# EAGLE board 13475-THAT_1646_Breakout-panel.v10 (EAGLE 7.5.0)
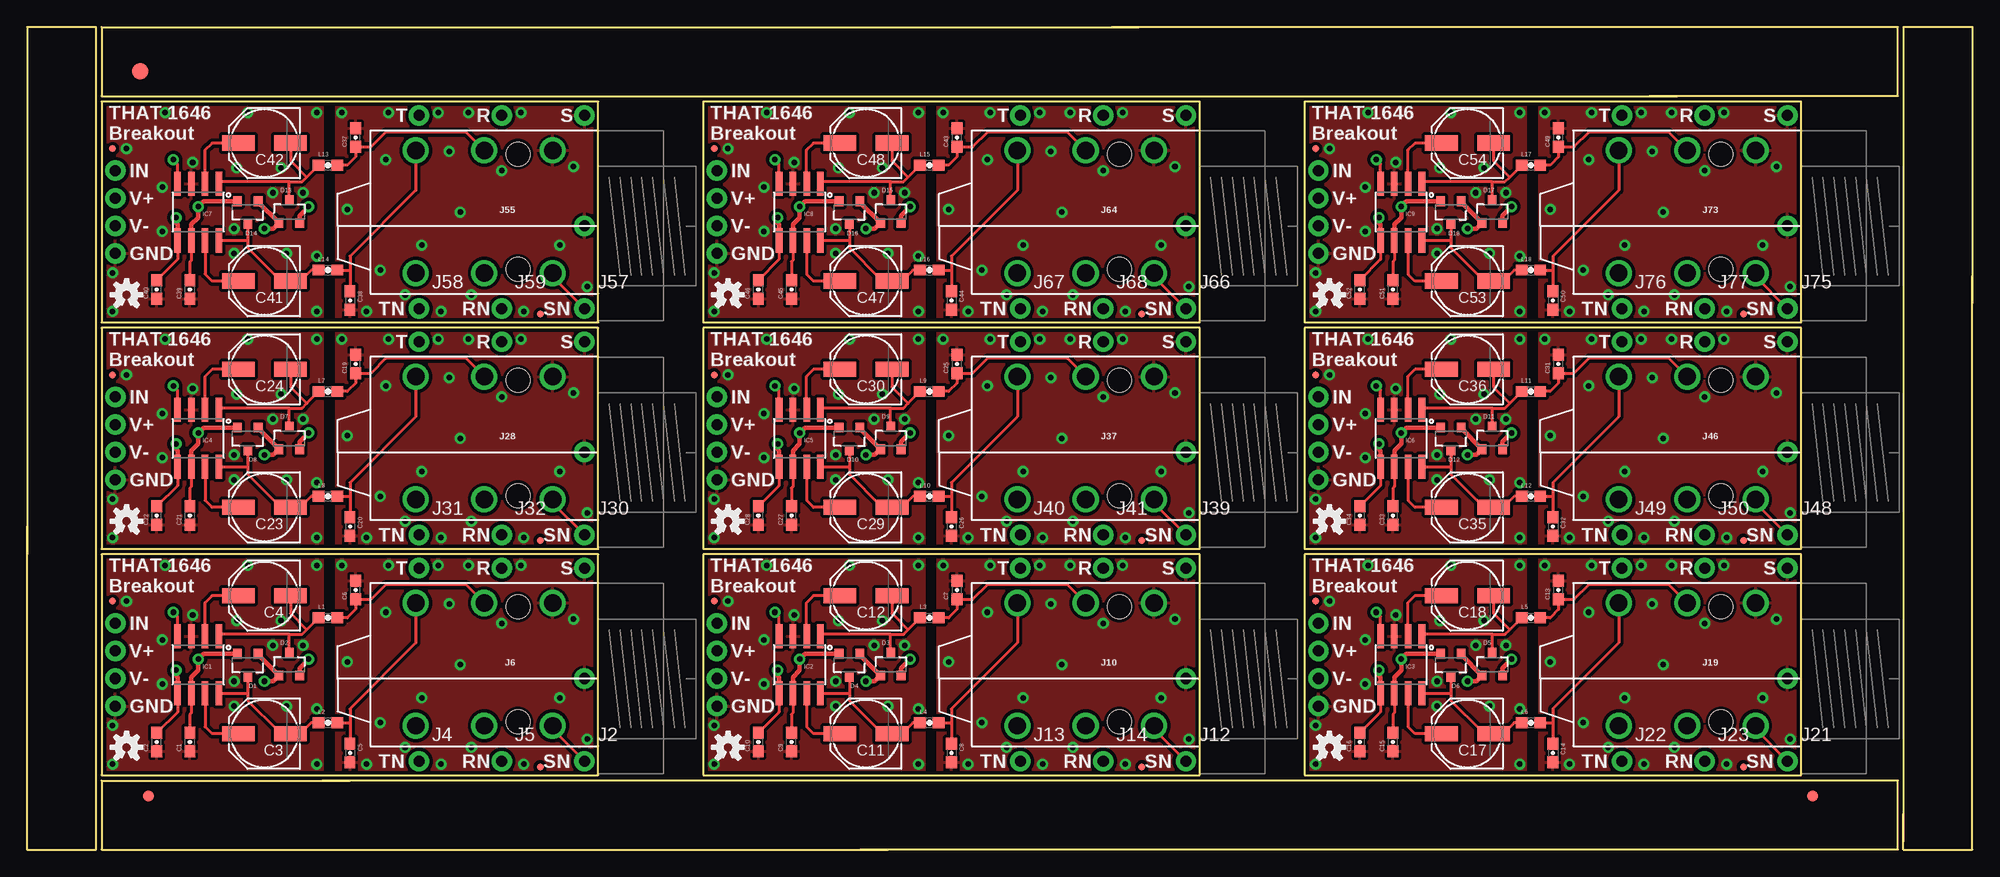
[diagram p0: board, top side]
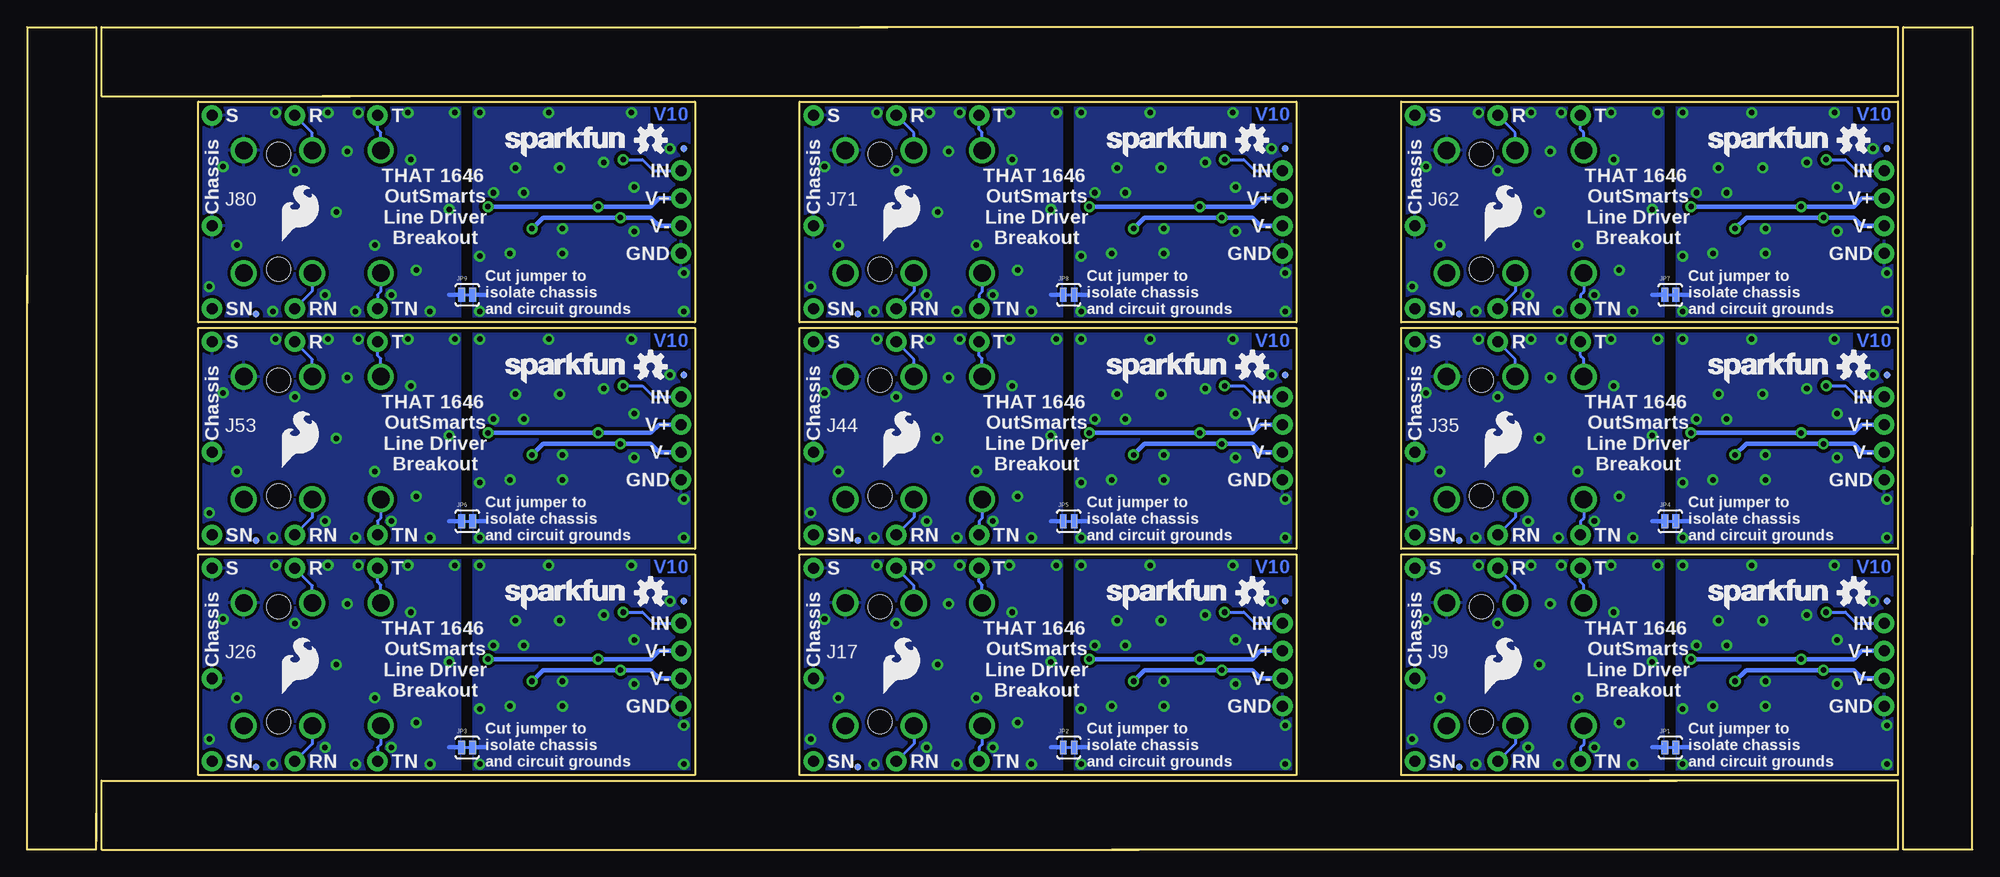
[diagram p1: board, bottom side, seen from below]

Size 179.07 x 75.69 mm. Coordinates in mm from the lower left corner, seen from the top.
Outline: 0,29.72 0,0 6.35,0 6.35,75.69 0,75.69 0,27.18
Outline: 79.25,0 6.86,0 6.86,6.35 29.72,6.35
Outline: 27.18,6.35 172.21,6.35 172.21,0 76.71,0
Outline: 172.72,0.76 172.72,75.69 179.07,75.69 179.07,50.29
Outline: 179.07,52.83 179.07,0 172.72,0 172.72,3.3
Outline: 99.82,75.69 172.21,75.69 172.21,69.34 149.35,69.34
Outline: 151.89,69.34 6.86,69.34 6.86,75.69 102.36,75.69
Outline: 6.86,6.86 52.58,6.86 52.58,27.18 6.86,27.18 6.86,6.86
Outline: 62.23,6.86 107.95,6.86 107.95,27.18 62.23,27.18 62.23,6.86
Outline: 117.6,6.86 163.32,6.86 163.32,27.18 117.6,27.18 117.6,6.86
Outline: 6.86,27.69 52.58,27.69 52.58,48.01 6.86,48.01 6.86,27.69
Outline: 62.23,27.69 107.95,27.69 107.95,48.01 62.23,48.01 62.23,27.69
Outline: 117.6,27.69 163.32,27.69 163.32,48.01 117.6,48.01 117.6,27.69
Outline: 6.86,48.51 52.58,48.51 52.58,68.83 6.86,68.83 6.86,48.51
Outline: 62.23,48.51 107.95,48.51 107.95,68.83 62.23,68.83 62.23,48.51
Outline: 117.6,48.51 163.32,48.51 163.32,68.83 117.6,68.83 117.6,48.51
Copper layers (1*16): Top 0.035mm / dielectric 1.5mm / Bottom 0.035mm
Design rules "SparkFun-2-layer-STANDARD": minimum track width 10mil, minimum drill 20mil, track to track 10mil, track to pad 8mil, pad to pad 8mil, via to via 10mil, smd to smd 8mil, copper to edge 8mil, drill to drill 8mil, minimum pad ring 10mil, minimum via ring 10mil, stop-mask expansion 4mil, vias tented up to drill 25mil, thermal gap 10mil

## Footprints (pad centres in the part's own frame; a part is rotated, then mirrored left to right if it is on the bottom)
0603-CAP = smd 1.1 x 1: 1 -0.85,0; 2 0.85,0
PANASONIC_D = smd 3 x 1.4: + 2.4,0; - -2.4,0
SOT23-3 = smd 0.8 x 0.9: 1 -0.95,-1; 2 0.95,-1; 3 0,1.1
FIDUCIAL-1.5X3 = smd 1.5 x 1.5: 1 0,0
FIDUCIAL-1X2 = smd 1 x 1: 1 0,0
MICRO-FIDUCIAL = smd 0.635 x 0.635: 1 0,0
SO08 = smd 0.61 x 2.21: 1 -1.905,-2.616; 2 -0.635,-2.616; 3 0.635,-2.616; 4 1.905,-2.616; 5 1.905,2.616; 6 0.635,2.616; 7 -0.635,2.616; 8 -1.905,2.616
1X04_NO_SILK_ALL_ROUND = drill 1.016 pad 1.88: 1 0,0; 2 2.54,0; 3 5.08,0; 4 7.62,0
1X01_NO_SILK = drill 1.016 pad 1.88: 1 0,0
AUDIO_JACK_0.25"_TRS_PTH_RA = drill 1.6: RING 10.5,-6.95; RING-NORM 10.5,4.35; SLEEVE 4.2,-6.95; SLEEVE-NORM 4.2,4.35; TIP 16.8,-6.95; TIP-NORM 16.8,4.35 | hole 2.2: 7.4,4; 7.4,-6.6
PAD-JUMPER-2-NC_BY_TRACE_YES_SILK = smd 0.635 x 1.27: 1 -0.508,0; 2 0.508,0
0603 = smd 1.1 x 1: 1 -0.85,0; 2 0.85,0

## Placement (x,y rotation side)
C1  0.1uF  [0603-CAP]  14.99,9.91 90 top
C2  0.1uF  [0603-CAP]  11.94,9.91 90 top
C3  10uf NP  [PANASONIC_D]  21.84,10.67 180 top
C4  10uf NP  [PANASONIC_D]  21.84,23.37 180 top
C5  100pF  [0603-CAP]  29.72,8.89 270 top
C6  100pF  [0603-CAP]  30.23,23.88 90 top
C7  100pF  [0603-CAP]  85.6,23.88 90 top
C8  100pF  [0603-CAP]  85.09,8.89 270 top
C9  0.1uF  [0603-CAP]  70.36,9.91 90 top
C10  0.1uF  [0603-CAP]  67.31,9.91 90 top
C11  10uf NP  [PANASONIC_D]  77.22,10.67 180 top
C12  10uf NP  [PANASONIC_D]  77.22,23.37 180 top
C13  100pF  [0603-CAP]  140.97,23.88 90 top
C14  100pF  [0603-CAP]  140.46,8.89 270 top
C15  0.1uF  [0603-CAP]  125.73,9.91 90 top
C16  0.1uF  [0603-CAP]  122.68,9.91 90 top
C17  10uf NP  [PANASONIC_D]  132.59,10.67 180 top
C18  10uf NP  [PANASONIC_D]  132.59,23.37 180 top
C19  100pF  [0603-CAP]  30.23,44.7 90 top
C20  100pF  [0603-CAP]  29.72,29.72 270 top
C21  0.1uF  [0603-CAP]  14.99,30.73 90 top
C22  0.1uF  [0603-CAP]  11.94,30.73 90 top
C23  10uf NP  [PANASONIC_D]  21.84,31.5 180 top
C24  10uf NP  [PANASONIC_D]  21.84,44.2 180 top
C25  100pF  [0603-CAP]  85.6,44.7 90 top
C26  100pF  [0603-CAP]  85.09,29.72 270 top
C27  0.1uF  [0603-CAP]  70.36,30.73 90 top
C28  0.1uF  [0603-CAP]  67.31,30.73 90 top
C29  10uf NP  [PANASONIC_D]  77.22,31.5 180 top
C30  10uf NP  [PANASONIC_D]  77.22,44.2 180 top
C31  100pF  [0603-CAP]  140.97,44.7 90 top
C32  100pF  [0603-CAP]  140.46,29.72 270 top
C33  0.1uF  [0603-CAP]  125.73,30.73 90 top
C34  0.1uF  [0603-CAP]  122.68,30.73 90 top
C35  10uf NP  [PANASONIC_D]  132.59,31.5 180 top
C36  10uf NP  [PANASONIC_D]  132.59,44.2 180 top
C37  100pF  [0603-CAP]  30.23,65.53 90 top
C38  100pF  [0603-CAP]  29.72,50.55 270 top
C39  0.1uF  [0603-CAP]  14.99,51.56 90 top
C40  0.1uF  [0603-CAP]  11.94,51.56 90 top
C41  10uf NP  [PANASONIC_D]  21.84,52.32 180 top
C42  10uf NP  [PANASONIC_D]  21.84,65.02 180 top
C43  100pF  [0603-CAP]  85.6,65.53 90 top
C44  100pF  [0603-CAP]  85.09,50.55 270 top
C45  0.1uF  [0603-CAP]  70.36,51.56 90 top
C46  0.1uF  [0603-CAP]  67.31,51.56 90 top
C47  10uf NP  [PANASONIC_D]  77.22,52.32 180 top
C48  10uf NP  [PANASONIC_D]  77.22,65.02 180 top
C49  100pF  [0603-CAP]  140.97,65.53 90 top
C50  100pF  [0603-CAP]  140.46,50.55 270 top
C51  0.1uF  [0603-CAP]  125.73,51.56 90 top
C52  0.1uF  [0603-CAP]  122.68,51.56 90 top
C53  10uf NP  [PANASONIC_D]  132.59,52.32 180 top
C54  10uf NP  [PANASONIC_D]  132.59,65.02 180 top
D1  BAV99  [SOT23-3]  20.32,17.02 180 top
D2  BAV99  [SOT23-3]  24.13,17.02 0 top
D3  BAV99  [SOT23-3]  79.5,17.02 0 top
D4  BAV99  [SOT23-3]  75.69,17.02 180 top
D5  BAV99  [SOT23-3]  134.87,17.02 0 top
D6  BAV99  [SOT23-3]  131.06,17.02 180 top
D7  BAV99  [SOT23-3]  24.13,37.85 0 top
D8  BAV99  [SOT23-3]  20.32,37.85 180 top
D9  BAV99  [SOT23-3]  79.5,37.85 0 top
D10  BAV99  [SOT23-3]  75.69,37.85 180 top
D11  BAV99  [SOT23-3]  134.87,37.85 0 top
D12  BAV99  [SOT23-3]  131.06,37.85 180 top
D13  BAV99  [SOT23-3]  24.13,58.67 0 top
D14  BAV99  [SOT23-3]  20.32,58.67 180 top
D15  BAV99  [SOT23-3]  79.5,58.67 0 top
D16  BAV99  [SOT23-3]  75.69,58.67 180 top
D17  BAV99  [SOT23-3]  134.87,58.67 0 top
D18  BAV99  [SOT23-3]  131.06,58.67 180 top
E$1  [FIDUCIAL-1.5X3]  10.41,71.63 0 top
E$3  [FIDUCIAL-1X2]  11.18,4.95 270 top
E$4  [FIDUCIAL-1X2]  164.34,4.95 90 top
FD1  FIDUCIALUFIDUCIAL  [MICRO-FIDUCIAL]  7.87,22.86 0 bottom
FD2  FIDUCIALUFIDUCIAL  [MICRO-FIDUCIAL]  47.24,7.62 0 bottom
FD3  FIDUCIALUFIDUCIAL  [MICRO-FIDUCIAL]  7.87,22.86 0 top
FD4  FIDUCIALUFIDUCIAL  [MICRO-FIDUCIAL]  47.24,7.62 0 top
FD5  FIDUCIALUFIDUCIAL  [MICRO-FIDUCIAL]  63.25,22.86 0 top
FD6  FIDUCIALUFIDUCIAL  [MICRO-FIDUCIAL]  102.62,7.62 0 top
FD7  FIDUCIALUFIDUCIAL  [MICRO-FIDUCIAL]  63.25,22.86 0 bottom
FD8  FIDUCIALUFIDUCIAL  [MICRO-FIDUCIAL]  102.62,7.62 0 bottom
FD9  FIDUCIALUFIDUCIAL  [MICRO-FIDUCIAL]  118.62,22.86 0 top
FD10  FIDUCIALUFIDUCIAL  [MICRO-FIDUCIAL]  157.99,7.62 0 top
FD11  FIDUCIALUFIDUCIAL  [MICRO-FIDUCIAL]  118.62,22.86 0 bottom
FD12  FIDUCIALUFIDUCIAL  [MICRO-FIDUCIAL]  157.99,7.62 0 bottom
FD13  FIDUCIALUFIDUCIAL  [MICRO-FIDUCIAL]  7.87,43.69 0 top
FD14  FIDUCIALUFIDUCIAL  [MICRO-FIDUCIAL]  47.24,28.45 0 top
FD15  FIDUCIALUFIDUCIAL  [MICRO-FIDUCIAL]  7.87,43.69 0 bottom
FD16  FIDUCIALUFIDUCIAL  [MICRO-FIDUCIAL]  47.24,28.45 0 bottom
FD17  FIDUCIALUFIDUCIAL  [MICRO-FIDUCIAL]  63.25,43.69 0 top
FD18  FIDUCIALUFIDUCIAL  [MICRO-FIDUCIAL]  102.62,28.45 0 top
FD19  FIDUCIALUFIDUCIAL  [MICRO-FIDUCIAL]  63.25,43.69 0 bottom
FD20  FIDUCIALUFIDUCIAL  [MICRO-FIDUCIAL]  102.62,28.45 0 bottom
FD21  FIDUCIALUFIDUCIAL  [MICRO-FIDUCIAL]  118.62,43.69 0 top
FD22  FIDUCIALUFIDUCIAL  [MICRO-FIDUCIAL]  157.99,28.45 0 top
FD23  FIDUCIALUFIDUCIAL  [MICRO-FIDUCIAL]  118.62,43.69 0 bottom
FD24  FIDUCIALUFIDUCIAL  [MICRO-FIDUCIAL]  157.99,28.45 0 bottom
FD25  FIDUCIALUFIDUCIAL  [MICRO-FIDUCIAL]  7.87,64.52 0 top
FD26  FIDUCIALUFIDUCIAL  [MICRO-FIDUCIAL]  47.24,49.28 0 top
FD27  FIDUCIALUFIDUCIAL  [MICRO-FIDUCIAL]  7.87,64.52 0 bottom
FD28  FIDUCIALUFIDUCIAL  [MICRO-FIDUCIAL]  47.24,49.28 0 bottom
FD29  FIDUCIALUFIDUCIAL  [MICRO-FIDUCIAL]  63.25,64.52 0 top
FD30  FIDUCIALUFIDUCIAL  [MICRO-FIDUCIAL]  102.62,49.28 0 top
FD31  FIDUCIALUFIDUCIAL  [MICRO-FIDUCIAL]  63.25,64.52 0 bottom
FD32  FIDUCIALUFIDUCIAL  [MICRO-FIDUCIAL]  102.62,49.28 0 bottom
FD33  FIDUCIALUFIDUCIAL  [MICRO-FIDUCIAL]  118.62,64.52 0 top
FD34  FIDUCIALUFIDUCIAL  [MICRO-FIDUCIAL]  157.99,49.28 0 top
FD35  FIDUCIALUFIDUCIAL  [MICRO-FIDUCIAL]  118.62,64.52 0 bottom
FD36  FIDUCIALUFIDUCIAL  [MICRO-FIDUCIAL]  157.99,49.28 0 bottom
IC1  THAT1646  [SO08]  15.75,17.02 180 top
IC2  THAT1646  [SO08]  71.12,17.02 180 top
IC3  THAT1646  [SO08]  126.49,17.02 180 top
IC4  THAT1646  [SO08]  15.75,37.85 180 top
IC5  THAT1646  [SO08]  71.12,37.85 180 top
IC6  THAT1646  [SO08]  126.49,37.85 180 top
IC7  THAT1646  [SO08]  15.75,58.67 180 top
IC8  THAT1646  [SO08]  71.12,58.67 180 top
IC9  THAT1646  [SO08]  126.49,58.67 180 top
J1  1x4  [1X04_NO_SILK_ALL_ROUND]  8.13,13.21 90 top
J2  SN  [1X01_NO_SILK]  51.31,8.13 0 top
J3  S  [1X01_NO_SILK]  51.31,25.91 0 bottom
J4  TN  [1X01_NO_SILK]  36.07,8.13 0 top
J5  RN  [1X01_NO_SILK]  43.69,8.13 0 top
J6  OUTPUT  [AUDIO_JACK_0.25"_TRS_PTH_RA]  52.58,15.75 180 top
J7  T  [1X01_NO_SILK]  36.07,25.91 0 top
J8  R  [1X01_NO_SILK]  43.69,25.91 0 top
J9  Chassis  [1X01_NO_SILK]  51.31,15.75 0 bottom
J10  OUTPUT  [AUDIO_JACK_0.25"_TRS_PTH_RA]  107.95,15.75 180 top
J11  1x4  [1X04_NO_SILK_ALL_ROUND]  63.5,13.21 90 top
J12  SN  [1X01_NO_SILK]  106.68,8.13 0 top
J13  TN  [1X01_NO_SILK]  91.44,8.13 0 top
J14  RN  [1X01_NO_SILK]  99.06,8.13 0 top
J15  T  [1X01_NO_SILK]  91.44,25.91 0 top
J16  R  [1X01_NO_SILK]  99.06,25.91 0 top
J17  Chassis  [1X01_NO_SILK]  106.68,15.75 0 bottom
J18  S  [1X01_NO_SILK]  106.68,25.91 0 bottom
J19  OUTPUT  [AUDIO_JACK_0.25"_TRS_PTH_RA]  163.32,15.75 180 top
J20  1x4  [1X04_NO_SILK_ALL_ROUND]  118.87,13.21 90 top
J21  SN  [1X01_NO_SILK]  162.05,8.13 0 top
J22  TN  [1X01_NO_SILK]  146.81,8.13 0 top
J23  RN  [1X01_NO_SILK]  154.43,8.13 0 top
J24  T  [1X01_NO_SILK]  146.81,25.91 0 top
J25  R  [1X01_NO_SILK]  154.43,25.91 0 top
J26  Chassis  [1X01_NO_SILK]  162.05,15.75 0 bottom
J27  S  [1X01_NO_SILK]  162.05,25.91 0 bottom
J28  OUTPUT  [AUDIO_JACK_0.25"_TRS_PTH_RA]  52.58,36.58 180 top
J29  1x4  [1X04_NO_SILK_ALL_ROUND]  8.13,34.04 90 top
J30  SN  [1X01_NO_SILK]  51.31,28.96 0 top
J31  TN  [1X01_NO_SILK]  36.07,28.96 0 top
J32  RN  [1X01_NO_SILK]  43.69,28.96 0 top
J33  T  [1X01_NO_SILK]  36.07,46.74 0 top
J34  R  [1X01_NO_SILK]  43.69,46.74 0 top
J35  Chassis  [1X01_NO_SILK]  51.31,36.58 0 bottom
J36  S  [1X01_NO_SILK]  51.31,46.74 0 bottom
J37  OUTPUT  [AUDIO_JACK_0.25"_TRS_PTH_RA]  107.95,36.58 180 top
J38  1x4  [1X04_NO_SILK_ALL_ROUND]  63.5,34.04 90 top
J39  SN  [1X01_NO_SILK]  106.68,28.96 0 top
J40  TN  [1X01_NO_SILK]  91.44,28.96 0 top
J41  RN  [1X01_NO_SILK]  99.06,28.96 0 top
J42  T  [1X01_NO_SILK]  91.44,46.74 0 top
J43  R  [1X01_NO_SILK]  99.06,46.74 0 top
J44  Chassis  [1X01_NO_SILK]  106.68,36.58 0 bottom
J45  S  [1X01_NO_SILK]  106.68,46.74 0 bottom
J46  OUTPUT  [AUDIO_JACK_0.25"_TRS_PTH_RA]  163.32,36.58 180 top
J47  1x4  [1X04_NO_SILK_ALL_ROUND]  118.87,34.04 90 top
J48  SN  [1X01_NO_SILK]  162.05,28.96 0 top
J49  TN  [1X01_NO_SILK]  146.81,28.96 0 top
J50  RN  [1X01_NO_SILK]  154.43,28.96 0 top
J51  T  [1X01_NO_SILK]  146.81,46.74 0 top
J52  R  [1X01_NO_SILK]  154.43,46.74 0 top
J53  Chassis  [1X01_NO_SILK]  162.05,36.58 0 bottom
J54  S  [1X01_NO_SILK]  162.05,46.74 0 bottom
J55  OUTPUT  [AUDIO_JACK_0.25"_TRS_PTH_RA]  52.58,57.4 180 top
J56  1x4  [1X04_NO_SILK_ALL_ROUND]  8.13,54.86 90 top
J57  SN  [1X01_NO_SILK]  51.31,49.78 0 top
J58  TN  [1X01_NO_SILK]  36.07,49.78 0 top
J59  RN  [1X01_NO_SILK]  43.69,49.78 0 top
J60  T  [1X01_NO_SILK]  36.07,67.56 0 top
J61  R  [1X01_NO_SILK]  43.69,67.56 0 top
J62  Chassis  [1X01_NO_SILK]  51.31,57.4 0 bottom
J63  S  [1X01_NO_SILK]  51.31,67.56 0 bottom
J64  OUTPUT  [AUDIO_JACK_0.25"_TRS_PTH_RA]  107.95,57.4 180 top
J65  1x4  [1X04_NO_SILK_ALL_ROUND]  63.5,54.86 90 top
J66  SN  [1X01_NO_SILK]  106.68,49.78 0 top
J67  TN  [1X01_NO_SILK]  91.44,49.78 0 top
J68  RN  [1X01_NO_SILK]  99.06,49.78 0 top
J69  T  [1X01_NO_SILK]  91.44,67.56 0 top
J70  R  [1X01_NO_SILK]  99.06,67.56 0 top
J71  Chassis  [1X01_NO_SILK]  106.68,57.4 0 bottom
J72  S  [1X01_NO_SILK]  106.68,67.56 0 bottom
J73  OUTPUT  [AUDIO_JACK_0.25"_TRS_PTH_RA]  163.32,57.4 180 top
J74  1x4  [1X04_NO_SILK_ALL_ROUND]  118.87,54.86 90 top
J75  SN  [1X01_NO_SILK]  162.05,49.78 0 top
J76  TN  [1X01_NO_SILK]  146.81,49.78 0 top
J77  RN  [1X01_NO_SILK]  154.43,49.78 0 top
J78  T  [1X01_NO_SILK]  146.81,67.56 0 top
J79  R  [1X01_NO_SILK]  154.43,67.56 0 top
J80  Chassis  [1X01_NO_SILK]  162.05,57.4 0 bottom
J81  S  [1X01_NO_SILK]  162.05,67.56 0 bottom
JP1  GND-JOIN  [PAD-JUMPER-2-NC_BY_TRACE_YES_SILK]  27.81,9.4 0 bottom
JP2  GND-JOIN  [PAD-JUMPER-2-NC_BY_TRACE_YES_SILK]  83.19,9.4 0 bottom
JP3  GND-JOIN  [PAD-JUMPER-2-NC_BY_TRACE_YES_SILK]  138.56,9.4 0 bottom
JP4  GND-JOIN  [PAD-JUMPER-2-NC_BY_TRACE_YES_SILK]  27.81,30.23 0 bottom
JP5  GND-JOIN  [PAD-JUMPER-2-NC_BY_TRACE_YES_SILK]  83.19,30.23 0 bottom
JP6  GND-JOIN  [PAD-JUMPER-2-NC_BY_TRACE_YES_SILK]  138.56,30.23 0 bottom
JP7  GND-JOIN  [PAD-JUMPER-2-NC_BY_TRACE_YES_SILK]  27.81,51.05 0 bottom
JP8  GND-JOIN  [PAD-JUMPER-2-NC_BY_TRACE_YES_SILK]  83.19,51.05 0 bottom
JP9  GND-JOIN  [PAD-JUMPER-2-NC_BY_TRACE_YES_SILK]  138.56,51.05 0 bottom
L1  27uH  [0603]  27.69,21.34 0 top
L2  27uH  [0603]  27.69,11.68 0 top
L3  27uH  [0603]  83.06,21.34 0 top
L4  27uH  [0603]  83.06,11.68 0 top
L5  27uH  [0603]  138.43,21.34 0 top
L6  27uH  [0603]  138.43,11.68 0 top
L7  27uH  [0603]  27.69,42.16 0 top
L8  27uH  [0603]  27.69,32.51 0 top
L9  27uH  [0603]  83.06,42.16 0 top
L10  27uH  [0603]  83.06,32.51 0 top
L11  27uH  [0603]  138.43,42.16 0 top
L12  27uH  [0603]  138.43,32.51 0 top
L13  27uH  [0603]  27.69,62.99 0 top
L14  27uH  [0603]  27.69,53.34 0 top
L15  27uH  [0603]  83.06,62.99 0 top
L16  27uH  [0603]  83.06,53.34 0 top
L17  27uH  [0603]  138.43,62.99 0 top
L18  27uH  [0603]  138.43,53.34 0 top
LOGO1  OSHW-LOGOS  [OSHW-LOGO-S]  9.14,9.4 0 top
LOGO2  OSHW-LOGOS  [OSHW-LOGO-S]  10.92,23.62 0 bottom
LOGO3  SFE_LOGO_NAME.1_INCH  [SFE_LOGO_NAME_.1]  80.14,21.59 0 bottom
LOGO4  SFE_LOGO_FLAME.2_INCH  [SFE_LOGO_FLAME_.2]  45.21,14.1 0 bottom
LOGO5  SFE_LOGO_NAME.1_INCH  [SFE_LOGO_NAME_.1]  24.77,21.59 0 bottom
LOGO6  OSHW-LOGOS  [OSHW-LOGO-S]  64.52,9.4 0 top
LOGO7  OSHW-LOGOS  [OSHW-LOGO-S]  66.29,23.62 0 bottom
LOGO8  SFE_LOGO_FLAME.2_INCH  [SFE_LOGO_FLAME_.2]  100.58,14.1 0 bottom
LOGO9  SFE_LOGO_NAME.1_INCH  [SFE_LOGO_NAME_.1]  135.51,21.59 0 bottom
LOGO10  OSHW-LOGOS  [OSHW-LOGO-S]  119.89,9.4 0 top
LOGO11  OSHW-LOGOS  [OSHW-LOGO-S]  121.67,23.62 0 bottom
LOGO12  SFE_LOGO_FLAME.2_INCH  [SFE_LOGO_FLAME_.2]  155.96,14.1 0 bottom
LOGO13  SFE_LOGO_NAME.1_INCH  [SFE_LOGO_NAME_.1]  24.77,42.42 0 bottom
LOGO14  OSHW-LOGOS  [OSHW-LOGO-S]  9.14,30.23 0 top
LOGO15  OSHW-LOGOS  [OSHW-LOGO-S]  10.92,44.45 0 bottom
LOGO16  SFE_LOGO_FLAME.2_INCH  [SFE_LOGO_FLAME_.2]  45.21,34.92 0 bottom
LOGO17  SFE_LOGO_NAME.1_INCH  [SFE_LOGO_NAME_.1]  80.14,42.42 0 bottom
LOGO18  OSHW-LOGOS  [OSHW-LOGO-S]  64.52,30.23 0 top
LOGO19  OSHW-LOGOS  [OSHW-LOGO-S]  66.29,44.45 0 bottom
LOGO20  SFE_LOGO_FLAME.2_INCH  [SFE_LOGO_FLAME_.2]  100.58,34.92 0 bottom
LOGO21  SFE_LOGO_NAME.1_INCH  [SFE_LOGO_NAME_.1]  135.51,42.42 0 bottom
LOGO22  OSHW-LOGOS  [OSHW-LOGO-S]  119.89,30.23 0 top
LOGO23  OSHW-LOGOS  [OSHW-LOGO-S]  121.67,44.45 0 bottom
LOGO24  SFE_LOGO_FLAME.2_INCH  [SFE_LOGO_FLAME_.2]  155.96,34.92 0 bottom
LOGO25  SFE_LOGO_NAME.1_INCH  [SFE_LOGO_NAME_.1]  24.77,63.25 0 bottom
LOGO26  OSHW-LOGOS  [OSHW-LOGO-S]  9.14,51.05 0 top
LOGO27  OSHW-LOGOS  [OSHW-LOGO-S]  10.92,65.28 0 bottom
LOGO28  SFE_LOGO_FLAME.2_INCH  [SFE_LOGO_FLAME_.2]  45.21,55.75 0 bottom
LOGO29  SFE_LOGO_NAME.1_INCH  [SFE_LOGO_NAME_.1]  80.14,63.25 0 bottom
LOGO30  OSHW-LOGOS  [OSHW-LOGO-S]  64.52,51.05 0 top
LOGO31  OSHW-LOGOS  [OSHW-LOGO-S]  66.29,65.28 0 bottom
LOGO32  SFE_LOGO_FLAME.2_INCH  [SFE_LOGO_FLAME_.2]  100.58,55.75 0 bottom
LOGO33  SFE_LOGO_NAME.1_INCH  [SFE_LOGO_NAME_.1]  135.51,63.25 0 bottom
LOGO34  OSHW-LOGOS  [OSHW-LOGO-S]  119.89,51.05 0 top
LOGO35  OSHW-LOGOS  [OSHW-LOGO-S]  121.67,65.28 0 bottom
LOGO36  SFE_LOGO_FLAME.2_INCH  [SFE_LOGO_FLAME_.2]  155.96,55.75 0 bottom

## Library data of the parts
C1 C2 C9 C10 C15 C16 C21 C22 C27 C28 C33 C34 C39 C40 C45 C46 C51 C52 = SparkFun-Capacitors; PROD_ID: CAP-08604
C3 C4 C11 C12 C17 C18 C23 C24 C29 C30 C35 C36 C41 C42 C47 C48 C53 C54 = that-ics; DK_PN: PCE4294TR-ND; MFR: Panasonic; MFR_PN: 1ea100np; PROD_ID: CAP-13474
C5-C8 C13 C14 C19 C20 C25 C26 C31 C32 C37 C38 C43 C44 C49 C50 = SparkFun-Capacitors; PROD_ID: CAP-07883
D1-D18 = SparkFun-DiscreteSemi; PROD_ID: DIO-10647
E$1 = SparkFun-Retired
E$3 E$4 FD1-FD36 LOGO1-LOGO36 = SparkFun-Aesthetics
IC1-IC9 = that-ics; PROD_ID: IC-13473
J1 J11 J20 J29 J38 J47 J56 J65 J74 = SparkFun-Connectors; PROD_ID: CONN-09696
J2-J5 J7-J9 J12-J18 J21-J27 J30-J36 J39-J45 J48-J54 J57-J63 J66-J72 J75-J81 = SparkFun-Connectors
J6 J10 J19 J28 J37 J46 J55 J64 J73 = SparkFun-Connectors; PROD_ID: CONN-12339; SF_ID: COM-11144
JP1-JP9 = SparkFun-Passives
L1-L18 = SparkFun-Passives; PROD_ID: NDUC-12579

## Nets
GND: C1.1 C2.1 IC1.3 J1.1 JP1.2
GND1: C9.1 C10.1 IC2.3 J11.1 JP2.2
GND2: C15.1 C16.1 IC3.3 J20.1 JP3.2
GND3: C21.1 C22.1 IC4.3 J29.1 JP4.2
GND4: C27.1 C28.1 IC5.3 J38.1 JP5.2
GND5: C33.1 C34.1 IC6.3 J47.1 JP6.2
GND6: C39.1 C40.1 IC7.3 J56.1 JP7.2
GND7: C45.1 C46.1 IC8.3 J65.1 JP8.2
GND8: C51.1 C52.1 IC9.3 J74.1 JP9.2
GND-ISO: C5.2 C6.2 J3.1 J6.SLEEVE J9.1 JP1.1
GND-ISO1: C7.2 C8.2 J10.SLEEVE J17.1 J18.1 JP2.1
GND-ISO2: C13.2 C14.2 J19.SLEEVE J26.1 J27.1 JP3.1
GND-ISO3: C19.2 C20.2 J28.SLEEVE J35.1 J36.1 JP4.1
GND-ISO4: C25.2 C26.2 J37.SLEEVE J44.1 J45.1 JP5.1
GND-ISO5: C31.2 C32.2 J46.SLEEVE J53.1 J54.1 JP6.1
GND-ISO6: C37.2 C38.2 J55.SLEEVE J62.1 J63.1 JP7.1
GND-ISO7: C43.2 C44.2 J64.SLEEVE J71.1 J72.1 JP8.1
GND-ISO8: C49.2 C50.2 J73.SLEEVE J80.1 J81.1 JP9.1
N$1: J5.1 J6.RING-NORM
N$2: J4.1 J6.TIP-NORM
N$3: J2.1 J6.SLEEVE-NORM
N$4: C8.1 J10.TIP J15.1 L4.2
N$5: C7.1 J10.RING J16.1 L3.2
N$6: C11.- D4.3 IC2.8 L4.1
N$7: C12.- D3.3 IC2.1 L3.1
N$8: C5.1 J6.TIP J7.1 L2.2
N$9: C6.1 J6.RING J8.1 L1.2
N$10: C3.- D1.3 IC1.8 L2.1
N$11: C4.- D2.3 IC1.1 L1.1
N$12: C12.+ IC2.2
N$13: C4.+ IC1.2
N$14: C3.+ IC1.7
N$15: C11.+ IC2.7
N$16: IC1.4 J1.4
N$17: IC2.4 J11.4
N$18: J10.RING-NORM J14.1
N$19: J10.TIP-NORM J13.1
N$20: J10.SLEEVE-NORM J12.1
N$21: C14.1 J19.TIP J24.1 L6.2
N$22: C13.1 J19.RING J25.1 L5.2
N$23: C17.- D6.3 IC3.8 L6.1
N$24: C18.- D5.3 IC3.1 L5.1
N$25: C18.+ IC3.2
N$26: C17.+ IC3.7
N$27: IC3.4 J20.4
N$28: J19.RING-NORM J23.1
N$29: J19.TIP-NORM J22.1
N$30: J19.SLEEVE-NORM J21.1
N$31: C20.1 J28.TIP J33.1 L8.2
N$32: C19.1 J28.RING J34.1 L7.2
N$33: C23.- D8.3 IC4.8 L8.1
N$34: C24.- D7.3 IC4.1 L7.1
N$35: C24.+ IC4.2
N$36: C23.+ IC4.7
N$37: IC4.4 J29.4
N$38: J28.RING-NORM J32.1
N$39: J28.TIP-NORM J31.1
N$40: J28.SLEEVE-NORM J30.1
N$41: C26.1 J37.TIP J42.1 L10.2
N$42: C25.1 J37.RING J43.1 L9.2
N$43: C29.- D10.3 IC5.8 L10.1
N$44: C30.- D9.3 IC5.1 L9.1
N$45: C30.+ IC5.2
N$46: C29.+ IC5.7
N$47: IC5.4 J38.4
N$48: J37.RING-NORM J41.1
N$49: J37.TIP-NORM J40.1
N$50: J37.SLEEVE-NORM J39.1
N$51: C32.1 J46.TIP J51.1 L12.2
N$52: C31.1 J46.RING J52.1 L11.2
N$53: C35.- D12.3 IC6.8 L12.1
N$54: C36.- D11.3 IC6.1 L11.1
N$55: C36.+ IC6.2
N$56: C35.+ IC6.7
N$57: IC6.4 J47.4
N$58: J46.RING-NORM J50.1
N$59: J46.TIP-NORM J49.1
N$60: J46.SLEEVE-NORM J48.1
N$61: C38.1 J55.TIP J60.1 L14.2
N$62: C37.1 J55.RING J61.1 L13.2
N$63: C41.- D14.3 IC7.8 L14.1
N$64: C42.- D13.3 IC7.1 L13.1
N$65: C42.+ IC7.2
N$66: C41.+ IC7.7
N$67: IC7.4 J56.4
N$68: J55.RING-NORM J59.1
N$69: J55.TIP-NORM J58.1
N$70: J55.SLEEVE-NORM J57.1
N$71: C44.1 J64.TIP J69.1 L16.2
N$72: C43.1 J64.RING J70.1 L15.2
N$73: C47.- D16.3 IC8.8 L16.1
N$74: C48.- D15.3 IC8.1 L15.1
N$75: C48.+ IC8.2
N$76: C47.+ IC8.7
N$77: IC8.4 J65.4
N$78: J64.RING-NORM J68.1
N$79: J64.TIP-NORM J67.1
N$80: J64.SLEEVE-NORM J66.1
N$81: C50.1 J73.TIP J78.1 L18.2
N$82: C49.1 J73.RING J79.1 L17.2
N$83: C53.- D18.3 IC9.8 L18.1
N$84: C54.- D17.3 IC9.1 L17.1
N$85: C54.+ IC9.2
N$86: C53.+ IC9.7
N$87: IC9.4 J74.4
N$88: J73.RING-NORM J77.1
N$89: J73.TIP-NORM J76.1
N$90: J73.SLEEVE-NORM J75.1
VCC: C1.2 D1.2 D2.2 IC1.6 J1.3
VCC1: C9.2 D3.2 D4.2 IC2.6 J11.3
VCC2: C15.2 D5.2 D6.2 IC3.6 J20.3
VCC3: C21.2 D7.2 D8.2 IC4.6 J29.3
VCC4: C27.2 D9.2 D10.2 IC5.6 J38.3
VCC5: C33.2 D11.2 D12.2 IC6.6 J47.3
VCC6: C39.2 D13.2 D14.2 IC7.6 J56.3
VCC7: C45.2 D15.2 D16.2 IC8.6 J65.3
VCC8: C51.2 D17.2 D18.2 IC9.6 J74.3
VNEG: C2.2 D1.1 D2.1 IC1.5 J1.2
VNEG1: C10.2 D3.1 D4.1 IC2.5 J11.2
VNEG2: C16.2 D5.1 D6.1 IC3.5 J20.2
VNEG3: C22.2 D7.1 D8.1 IC4.5 J29.2
VNEG4: C28.2 D9.1 D10.1 IC5.5 J38.2
VNEG5: C34.2 D11.1 D12.1 IC6.5 J47.2
VNEG6: C40.2 D13.1 D14.1 IC7.5 J56.2
VNEG7: C46.2 D15.1 D16.1 IC8.5 J65.2
VNEG8: C52.2 D17.1 D18.1 IC9.5 J74.2

## Tracks (layer width: path | path; a pad name or v marks a point on that pad's centre or on a via)
GND  (via drill 0.51)
  Bottom 0.406: JP1.2 26.16,9.4
  other vias: 7.87,7.87 12.45,15.24 12.45,19.3 7.87,11.43 9.14,22.86 12.7,26.16 26.67,26.16 25.4,18.8 22.61,18.8 19.05,15.49 19.05,13.21 23.88,13.21 26.67,12.95 26.67,7.87 15.24,21.59 19.3,21.08 23.37,21.08 20.32,26.16
  pour Top (isolate 0.305): 27.18,27.18 27.18,6.86 6.86,6.86 6.86,27.18
  pour Bottom (isolate 0.305): 6.86,27.18 6.86,6.86 27.18,6.86 27.18,27.18
GND1  (via drill 0.51)
  Bottom 0.406: JP2.2 81.53,9.4
  other vias: 63.25,7.87 67.82,15.24 67.82,19.3 63.25,11.43 64.52,22.86 68.07,26.16 82.04,26.16 80.77,18.8 77.98,18.8 74.42,15.49 74.42,13.21 79.25,13.21 82.04,12.95 82.04,7.87 70.61,21.59 74.68,21.08 78.74,21.08 75.69,26.16
  pour Top (isolate 0.305): 82.55,27.18 82.55,6.86 62.23,6.86 62.23,27.18
  pour Bottom (isolate 0.305): 62.23,27.18 62.23,6.86 82.55,6.86 82.55,27.18
GND2  (via drill 0.51)
  Bottom 0.406: JP3.2 136.91,9.4
  other vias: 118.62,7.87 123.19,15.24 123.19,19.3 118.62,11.43 119.89,22.86 123.44,26.16 137.41,26.16 136.14,18.8 133.35,18.8 129.79,15.49 129.79,13.21 134.62,13.21 137.41,12.95 137.41,7.87 125.98,21.59 130.05,21.08 134.11,21.08 131.06,26.16
  pour Top (isolate 0.305): 137.92,27.18 137.92,6.86 117.6,6.86 117.6,27.18
  pour Bottom (isolate 0.305): 117.6,27.18 117.6,6.86 137.92,6.86 137.92,27.18
GND3  (via drill 0.51)
  Bottom 0.406: JP4.2 26.16,30.23
  other vias: 7.87,28.7 12.45,36.07 12.45,40.13 7.87,32.26 9.14,43.69 12.7,46.99 26.67,46.99 25.4,39.62 22.61,39.62 19.05,36.32 19.05,34.04 23.88,34.04 26.67,33.78 26.67,28.7 15.24,42.42 19.3,41.91 23.37,41.91 20.32,46.99
  pour Top (isolate 0.305): 27.18,48.01 27.18,27.69 6.86,27.69 6.86,48.01
  pour Bottom (isolate 0.305): 6.86,48.01 6.86,27.69 27.18,27.69 27.18,48.01
GND4  (via drill 0.51)
  Bottom 0.406: JP5.2 81.53,30.23
  other vias: 63.25,28.7 67.82,36.07 67.82,40.13 63.25,32.26 64.52,43.69 68.07,46.99 82.04,46.99 80.77,39.62 77.98,39.62 74.42,36.32 74.42,34.04 79.25,34.04 82.04,33.78 82.04,28.7 70.61,42.42 74.68,41.91 78.74,41.91 75.69,46.99
  pour Top (isolate 0.305): 82.55,48.01 82.55,27.69 62.23,27.69 62.23,48.01
  pour Bottom (isolate 0.305): 62.23,48.01 62.23,27.69 82.55,27.69 82.55,48.01
GND5  (via drill 0.51)
  Bottom 0.406: JP6.2 136.91,30.23
  other vias: 118.62,28.7 123.19,36.07 123.19,40.13 118.62,32.26 119.89,43.69 123.44,46.99 137.41,46.99 136.14,39.62 133.35,39.62 129.79,36.32 129.79,34.04 134.62,34.04 137.41,33.78 137.41,28.7 125.98,42.42 130.05,41.91 134.11,41.91 131.06,46.99
  pour Top (isolate 0.305): 137.92,48.01 137.92,27.69 117.6,27.69 117.6,48.01
  pour Bottom (isolate 0.305): 117.6,48.01 117.6,27.69 137.92,27.69 137.92,48.01
GND6  (via drill 0.51)
  Bottom 0.406: JP7.2 26.16,51.05
  other vias: 7.87,49.53 12.45,56.9 12.45,60.96 7.87,53.09 9.14,64.52 12.7,67.82 26.67,67.82 25.4,60.45 22.61,60.45 19.05,57.15 19.05,54.86 23.88,54.86 26.67,54.61 26.67,49.53 15.24,63.25 19.3,62.74 23.37,62.74 20.32,67.82
  pour Top (isolate 0.305): 27.18,68.83 27.18,48.51 6.86,48.51 6.86,68.83
  pour Bottom (isolate 0.305): 6.86,68.83 6.86,48.51 27.18,48.51 27.18,68.83
GND7  (via drill 0.51)
  Bottom 0.406: JP8.2 81.53,51.05
  other vias: 63.25,49.53 67.82,56.9 67.82,60.96 63.25,53.09 64.52,64.52 68.07,67.82 82.04,67.82 80.77,60.45 77.98,60.45 74.42,57.15 74.42,54.86 79.25,54.86 82.04,54.61 82.04,49.53 70.61,63.25 74.68,62.74 78.74,62.74 75.69,67.82
  pour Top (isolate 0.305): 82.55,68.83 82.55,48.51 62.23,48.51 62.23,68.83
  pour Bottom (isolate 0.305): 62.23,68.83 62.23,48.51 82.55,48.51 82.55,68.83
GND8  (via drill 0.51)
  Bottom 0.406: JP9.2 136.91,51.05
  other vias: 118.62,49.53 123.19,56.9 123.19,60.96 118.62,53.09 119.89,64.52 123.44,67.82 137.41,67.82 136.14,60.45 133.35,60.45 129.79,57.15 129.79,54.86 134.62,54.86 137.41,54.61 137.41,49.53 125.98,63.25 130.05,62.74 134.11,62.74 131.06,67.82
  pour Top (isolate 0.305): 137.92,68.83 137.92,48.51 117.6,48.51 117.6,68.83
  pour Bottom (isolate 0.305): 117.6,68.83 117.6,48.51 137.92,48.51 137.92,68.83
GND-ISO  (via drill 0.51)
  Bottom 0.406: JP1.1 29.46,9.4
  other vias: 28.96,26.16 33.27,26.16 43.69,20.83 49.02,13.97 39.88,17.02 36.32,13.97 38.1,7.87 34.8,9.4 40.89,9.4 51.56,10.16 29.46,17.27 33.02,21.84 32.51,11.68 45.72,7.87 38.86,22.61 37.85,26.16 40.64,26.16 45.47,26.16 31.24,7.87 50.29,21.21
  pour Bottom (isolate 0.305): 28.45,6.86 28.45,27.18 52.58,27.18 52.58,6.86
  pour Top (isolate 0.305): 52.58,6.86 52.58,27.18 28.45,27.18 28.45,6.86
GND-ISO1  (via drill 0.51)
  Bottom 0.406: JP2.1 84.84,9.4
  other vias: 84.33,26.16 88.65,26.16 99.06,20.83 104.39,13.97 95.25,17.02 91.69,13.97 93.47,7.87 90.17,9.4 96.27,9.4 106.93,10.16 84.84,17.27 88.39,21.84 87.88,11.68 101.09,7.87 94.23,22.61 93.22,26.16 96.01,26.16 100.84,26.16 86.61,7.87 105.66,21.21
  pour Bottom (isolate 0.305): 83.82,6.86 83.82,27.18 107.95,27.18 107.95,6.86
  pour Top (isolate 0.305): 107.95,6.86 107.95,27.18 83.82,27.18 83.82,6.86
GND-ISO2  (via drill 0.51)
  Bottom 0.406: JP3.1 140.21,9.4
  other vias: 139.7,26.16 144.02,26.16 154.43,20.83 159.77,13.97 150.62,17.02 147.07,13.97 148.84,7.87 145.54,9.4 151.64,9.4 162.31,10.16 140.21,17.27 143.76,21.84 143.26,11.68 156.46,7.87 149.61,22.61 148.59,26.16 151.38,26.16 156.21,26.16 141.99,7.87 161.04,21.21
  pour Bottom (isolate 0.305): 139.19,6.86 139.19,27.18 163.32,27.18 163.32,6.86
  pour Top (isolate 0.305): 163.32,6.86 163.32,27.18 139.19,27.18 139.19,6.86
GND-ISO3  (via drill 0.51)
  Bottom 0.406: JP4.1 29.46,30.23
  other vias: 28.96,46.99 33.27,46.99 43.69,41.66 49.02,34.8 39.88,37.85 36.32,34.8 38.1,28.7 34.8,30.23 40.89,30.23 51.56,30.99 29.46,38.1 33.02,42.67 32.51,32.51 45.72,28.7 38.86,43.43 37.85,46.99 40.64,46.99 45.47,46.99 31.24,28.7 50.29,42.04
  pour Bottom (isolate 0.305): 28.45,27.69 28.45,48.01 52.58,48.01 52.58,27.69
  pour Top (isolate 0.305): 52.58,27.69 52.58,48.01 28.45,48.01 28.45,27.69
GND-ISO4  (via drill 0.51)
  Bottom 0.406: JP5.1 84.84,30.23
  other vias: 84.33,46.99 88.65,46.99 99.06,41.66 104.39,34.8 95.25,37.85 91.69,34.8 93.47,28.7 90.17,30.23 96.27,30.23 106.93,30.99 84.84,38.1 88.39,42.67 87.88,32.51 101.09,28.7 94.23,43.43 93.22,46.99 96.01,46.99 100.84,46.99 86.61,28.7 105.66,42.04
  pour Bottom (isolate 0.305): 83.82,27.69 83.82,48.01 107.95,48.01 107.95,27.69
  pour Top (isolate 0.305): 107.95,27.69 107.95,48.01 83.82,48.01 83.82,27.69
GND-ISO5  (via drill 0.51)
  Bottom 0.406: JP6.1 140.21,30.23
  other vias: 139.7,46.99 144.02,46.99 154.43,41.66 159.77,34.8 150.62,37.85 147.07,34.8 148.84,28.7 145.54,30.23 151.64,30.23 162.31,30.99 140.21,38.1 143.76,42.67 143.26,32.51 156.46,28.7 149.61,43.43 148.59,46.99 151.38,46.99 156.21,46.99 141.99,28.7 161.04,42.04
  pour Bottom (isolate 0.305): 139.19,27.69 139.19,48.01 163.32,48.01 163.32,27.69
  pour Top (isolate 0.305): 163.32,27.69 163.32,48.01 139.19,48.01 139.19,27.69
GND-ISO6  (via drill 0.51)
  Bottom 0.406: JP7.1 29.46,51.05
  other vias: 28.96,67.82 33.27,67.82 43.69,62.48 49.02,55.63 39.88,58.67 36.32,55.63 38.1,49.53 34.8,51.05 40.89,51.05 51.56,51.82 29.46,58.93 33.02,63.5 32.51,53.34 45.72,49.53 38.86,64.26 37.85,67.82 40.64,67.82 45.47,67.82 31.24,49.53 50.29,62.87
  pour Bottom (isolate 0.305): 28.45,48.51 28.45,68.83 52.58,68.83 52.58,48.51
  pour Top (isolate 0.305): 52.58,48.51 52.58,68.83 28.45,68.83 28.45,48.51
GND-ISO7  (via drill 0.51)
  Bottom 0.406: JP8.1 84.84,51.05
  other vias: 84.33,67.82 88.65,67.82 99.06,62.48 104.39,55.63 95.25,58.67 91.69,55.63 93.47,49.53 90.17,51.05 96.27,51.05 106.93,51.82 84.84,58.93 88.39,63.5 87.88,53.34 101.09,49.53 94.23,64.26 93.22,67.82 96.01,67.82 100.84,67.82 86.61,49.53 105.66,62.87
  pour Bottom (isolate 0.305): 83.82,48.51 83.82,68.83 107.95,68.83 107.95,48.51
  pour Top (isolate 0.305): 107.95,48.51 107.95,68.83 83.82,68.83 83.82,48.51
GND-ISO8  (via drill 0.51)
  Bottom 0.406: JP9.1 140.21,51.05
  other vias: 139.7,67.82 144.02,67.82 154.43,62.48 159.77,55.63 150.62,58.67 147.07,55.63 148.84,49.53 145.54,51.05 151.64,51.05 162.31,51.82 140.21,58.93 143.76,63.5 143.26,53.34 156.46,49.53 149.61,64.26 148.59,67.82 151.38,67.82 156.21,67.82 141.99,49.53 161.04,62.87
  pour Bottom (isolate 0.305): 139.19,48.51 139.19,68.83 163.32,68.83 163.32,48.51
  pour Top (isolate 0.305): 163.32,48.51 163.32,68.83 139.19,68.83 139.19,48.51
N$1
  Bottom 0.254: J6.RING-NORM 42.08,9.74 J5.1
N$2
  Bottom 0.254: J6.TIP-NORM 35.78,9.69 36.07,9.4 J4.1
N$3
  Top 0.254: J2.1 48.38,11.06 J6.SLEEVE-NORM
N$4
  Top 0.254: 85.09,11.68 85.09,12.95 91.15,19.01 J10.TIP | 85.09,11.68 C8.1 | L4.2 85.09,11.68
  Bottom 0.254: J10.TIP 91.15,24.35 91.44,24.64 J15.1
N$5
  Top 0.254: L3.2 84.84,21.34 85.6,22.1 C7.1 87.03,23.03 88.39,24.38 95.76,24.38 J10.RING
  Bottom 0.254: J10.RING 97.45,24.3 J16.1
N$6
  Top 0.254: IC2.8 75.69,14.4 | D4.3 75.69,14.4 | L4.1 81.53,11.68 81.03,11.18 80.12,11.18 C11.- 79.36,10.92 78.49,10.92 75.69,13.72 75.69,14.4
N$7
  Top 0.254: 79.5,19.81 73.2,19.81 IC2.1 | D3.3 79.5,19.81 | 81.11,20.24 80.68,19.81 79.5,19.81 | 81.11,20.24 L3.1 | C12.- 79.62,21.73 81.11,20.24
N$8
  Top 0.254: 29.72,11.68 29.72,12.95 35.78,19.01 J6.TIP | 29.72,11.68 C5.1 | L2.2 29.72,11.68
  Bottom 0.254: J6.TIP 35.78,24.35 36.07,24.64 J7.1
N$9
  Top 0.254: L1.2 29.46,21.34 30.23,22.1 C6.1 31.66,23.03 33.02,24.38 40.39,24.38 J6.RING
  Bottom 0.254: J6.RING 42.08,24.3 J8.1
N$10
  Top 0.254: IC1.8 20.32,14.4 | D1.3 20.32,14.4 | L2.1 26.16,11.68 25.65,11.18 24.75,11.18 C3.- 23.99,10.92 23.11,10.92 20.32,13.72 20.32,14.4
N$11
  Top 0.254: 24.13,19.81 17.83,19.81 IC1.1 | D2.3 24.13,19.81 | 25.74,20.24 25.31,19.81 24.13,19.81 | 25.74,20.24 L1.1 | C4.- 24.24,21.73 25.74,20.24
N$12
  Top 0.254: IC2.2 71.75,22.73 72.39,23.37 C12.+
N$13
  Top 0.254: IC1.2 16.38,22.73 17.02,23.37 C4.+
N$14
  Top 0.254: IC1.7 16.38,11.3 17.02,10.67 C3.+
N$15
  Top 0.254: IC2.7 71.75,11.3 72.39,10.67 C11.+
N$16  (via drill 0.51)
  Top 0.254: IC1.4 13.84,21.46 v13.46,21.84
  Bottom 0.254: v13.46,21.84 11.68,21.84 10.67,20.83 J1.4
N$17  (via drill 0.51)
  Top 0.254: IC2.4 69.22,21.46 v68.83,21.84
  Bottom 0.254: v68.83,21.84 67.06,21.84 66.04,20.83 J11.4
N$18
  Bottom 0.254: J10.RING-NORM 97.45,9.74 J14.1
N$19
  Bottom 0.254: J10.TIP-NORM 91.15,9.69 91.44,9.4 J13.1
N$20
  Top 0.254: J12.1 103.75,11.06 J10.SLEEVE-NORM
N$21
  Top 0.254: 140.46,11.68 140.46,12.95 146.52,19.01 J19.TIP | 140.46,11.68 C14.1 | L6.2 140.46,11.68
  Bottom 0.254: J19.TIP 146.52,24.35 146.81,24.64 J24.1
N$22
  Top 0.254: L5.2 140.21,21.34 140.97,22.1 C13.1 142.41,23.03 143.76,24.38 151.14,24.38 J19.RING
  Bottom 0.254: J19.RING 152.82,24.3 J25.1
N$23
  Top 0.254: IC3.8 131.06,14.4 | D6.3 131.06,14.4 | L6.1 136.91,11.68 136.4,11.18 135.5,11.18 C17.- 134.73,10.92 133.86,10.92 131.06,13.72 131.06,14.4
N$24
  Top 0.254: 134.87,19.81 128.57,19.81 IC3.1 | D5.3 134.87,19.81 | 136.48,20.24 136.06,19.81 134.87,19.81 | 136.48,20.24 L5.1 | C18.- 134.99,21.73 136.48,20.24
N$25
  Top 0.254: IC3.2 127.13,22.73 127.76,23.37 C18.+
N$26
  Top 0.254: IC3.7 127.13,11.3 127.76,10.67 C17.+
N$27  (via drill 0.51)
  Top 0.254: IC3.4 124.59,21.46 v124.21,21.84
  Bottom 0.254: v124.21,21.84 122.43,21.84 121.41,20.83 J20.4
N$28
  Bottom 0.254: J19.RING-NORM 152.82,9.74 J23.1
N$29
  Bottom 0.254: J19.TIP-NORM 146.52,9.69 146.81,9.4 J22.1
N$30
  Top 0.254: J21.1 159.12,11.06 J19.SLEEVE-NORM
N$31
  Top 0.254: 29.72,32.51 29.72,33.78 35.78,39.84 J28.TIP | 29.72,32.51 C20.1 | L8.2 29.72,32.51
  Bottom 0.254: J28.TIP 35.78,45.18 36.07,45.47 J33.1
N$32
  Top 0.254: L7.2 29.46,42.16 30.23,42.93 C19.1 31.66,43.85 33.02,45.21 40.39,45.21 J28.RING
  Bottom 0.254: J28.RING 42.08,45.13 J34.1
N$33
  Top 0.254: IC4.8 20.32,35.23 | D8.3 20.32,35.23 | L8.1 26.16,32.51 25.65,32 24.75,32 C23.- 23.99,31.75 23.11,31.75 20.32,34.54 20.32,35.23
N$34
  Top 0.254: 24.13,40.64 17.83,40.64 IC4.1 | D7.3 24.13,40.64 | 25.74,41.06 25.31,40.64 24.13,40.64 | 25.74,41.06 L7.1 | C24.- 24.24,42.56 25.74,41.06
N$35
  Top 0.254: IC4.2 16.38,43.56 17.02,44.2 C24.+
N$36
  Top 0.254: IC4.7 16.38,32.13 17.02,31.5 C23.+
N$37  (via drill 0.51)
  Top 0.254: IC4.4 13.84,42.29 v13.46,42.67
  Bottom 0.254: v13.46,42.67 11.68,42.67 10.67,41.66 J29.4
N$38
  Bottom 0.254: J28.RING-NORM 42.08,30.57 J32.1
N$39
  Bottom 0.254: J28.TIP-NORM 35.78,30.52 36.07,30.23 J31.1
N$40
  Top 0.254: J30.1 48.38,31.89 J28.SLEEVE-NORM
N$41
  Top 0.254: 85.09,32.51 85.09,33.78 91.15,39.84 J37.TIP | 85.09,32.51 C26.1 | L10.2 85.09,32.51
  Bottom 0.254: J37.TIP 91.15,45.18 91.44,45.47 J42.1
N$42
  Top 0.254: L9.2 84.84,42.16 85.6,42.93 C25.1 87.03,43.85 88.39,45.21 95.76,45.21 J37.RING
  Bottom 0.254: J37.RING 97.45,45.13 J43.1
N$43
  Top 0.254: IC5.8 75.69,35.23 | D10.3 75.69,35.23 | L10.1 81.53,32.51 81.03,32 80.12,32 C29.- 79.36,31.75 78.49,31.75 75.69,34.54 75.69,35.23
N$44
  Top 0.254: 79.5,40.64 73.2,40.64 IC5.1 | D9.3 79.5,40.64 | 81.11,41.06 80.68,40.64 79.5,40.64 | 81.11,41.06 L9.1 | C30.- 79.62,42.56 81.11,41.06
N$45
  Top 0.254: IC5.2 71.75,43.56 72.39,44.2 C30.+
N$46
  Top 0.254: IC5.7 71.75,32.13 72.39,31.5 C29.+
N$47  (via drill 0.51)
  Top 0.254: IC5.4 69.22,42.29 v68.83,42.67
  Bottom 0.254: v68.83,42.67 67.06,42.67 66.04,41.66 J38.4
N$48
  Bottom 0.254: J37.RING-NORM 97.45,30.57 J41.1
N$49
  Bottom 0.254: J37.TIP-NORM 91.15,30.52 91.44,30.23 J40.1
N$50
  Top 0.254: J39.1 103.75,31.89 J37.SLEEVE-NORM
N$51
  Top 0.254: 140.46,32.51 140.46,33.78 146.52,39.84 J46.TIP | 140.46,32.51 C32.1 | L12.2 140.46,32.51
  Bottom 0.254: J46.TIP 146.52,45.18 146.81,45.47 J51.1
N$52
  Top 0.254: L11.2 140.21,42.16 140.97,42.93 C31.1 142.41,43.85 143.76,45.21 151.14,45.21 J46.RING
  Bottom 0.254: J46.RING 152.82,45.13 J52.1
N$53
  Top 0.254: IC6.8 131.06,35.23 | D12.3 131.06,35.23 | L12.1 136.91,32.51 136.4,32 135.5,32 C35.- 134.73,31.75 133.86,31.75 131.06,34.54 131.06,35.23
N$54
  Top 0.254: 134.87,40.64 128.57,40.64 IC6.1 | D11.3 134.87,40.64 | 136.48,41.06 136.06,40.64 134.87,40.64 | 136.48,41.06 L11.1 | C36.- 134.99,42.56 136.48,41.06
N$55
  Top 0.254: IC6.2 127.13,43.56 127.76,44.2 C36.+
N$56
  Top 0.254: IC6.7 127.13,32.13 127.76,31.5 C35.+
N$57  (via drill 0.51)
  Top 0.254: IC6.4 124.59,42.29 v124.21,42.67
  Bottom 0.254: v124.21,42.67 122.43,42.67 121.41,41.66 J47.4
N$58
  Bottom 0.254: J46.RING-NORM 152.82,30.57 J50.1
N$59
  Bottom 0.254: J46.TIP-NORM 146.52,30.52 146.81,30.23 J49.1
N$60
  Top 0.254: J48.1 159.12,31.89 J46.SLEEVE-NORM
N$61
  Top 0.254: 29.72,53.34 29.72,54.61 35.78,60.67 J55.TIP | 29.72,53.34 C38.1 | L14.2 29.72,53.34
  Bottom 0.254: J55.TIP 35.78,66 36.07,66.29 J60.1
N$62
  Top 0.254: L13.2 29.46,62.99 30.23,63.75 C37.1 31.66,64.68 33.02,66.04 40.39,66.04 J55.RING
  Bottom 0.254: J55.RING 42.08,65.95 J61.1
N$63
  Top 0.254: IC7.8 20.32,56.06 | D14.3 20.32,56.06 | L14.1 26.16,53.34 25.65,52.83 24.75,52.83 C41.- 23.99,52.58 23.11,52.58 20.32,55.37 20.32,56.06
N$64
  Top 0.254: 24.13,61.47 17.83,61.47 IC7.1 | D13.3 24.13,61.47 | 25.74,61.89 25.31,61.47 24.13,61.47 | 25.74,61.89 L13.1 | C42.- 24.24,63.39 25.74,61.89
N$65
  Top 0.254: IC7.2 16.38,64.39 17.02,65.02 C42.+
N$66
  Top 0.254: IC7.7 16.38,52.96 17.02,52.32 C41.+
N$67  (via drill 0.51)
  Top 0.254: IC7.4 13.84,63.12 v13.46,63.5
  Bottom 0.254: v13.46,63.5 11.68,63.5 10.67,62.48 J56.4
N$68
  Bottom 0.254: J55.RING-NORM 42.08,51.39 J59.1
N$69
  Bottom 0.254: J55.TIP-NORM 35.78,51.34 36.07,51.05 J58.1
N$70
  Top 0.254: J57.1 48.38,52.71 J55.SLEEVE-NORM
N$71
  Top 0.254: 85.09,53.34 85.09,54.61 91.15,60.67 J64.TIP | 85.09,53.34 C44.1 | L16.2 85.09,53.34
  Bottom 0.254: J64.TIP 91.15,66 91.44,66.29 J69.1
N$72
  Top 0.254: L15.2 84.84,62.99 85.6,63.75 C43.1 87.03,64.68 88.39,66.04 95.76,66.04 J64.RING
  Bottom 0.254: J64.RING 97.45,65.95 J70.1
N$73
  Top 0.254: IC8.8 75.69,56.06 | D16.3 75.69,56.06 | L16.1 81.53,53.34 81.03,52.83 80.12,52.83 C47.- 79.36,52.58 78.49,52.58 75.69,55.37 75.69,56.06
N$74
  Top 0.254: 79.5,61.47 73.2,61.47 IC8.1 | D15.3 79.5,61.47 | 81.11,61.89 80.68,61.47 79.5,61.47 | 81.11,61.89 L15.1 | C48.- 79.62,63.39 81.11,61.89
N$75
  Top 0.254: IC8.2 71.75,64.39 72.39,65.02 C48.+
N$76
  Top 0.254: IC8.7 71.75,52.96 72.39,52.32 C47.+
N$77  (via drill 0.51)
  Top 0.254: IC8.4 69.22,63.12 v68.83,63.5
  Bottom 0.254: v68.83,63.5 67.06,63.5 66.04,62.48 J65.4
N$78
  Bottom 0.254: J64.RING-NORM 97.45,51.39 J68.1
N$79
  Bottom 0.254: J64.TIP-NORM 91.15,51.34 91.44,51.05 J67.1
N$80
  Top 0.254: J66.1 103.75,52.71 J64.SLEEVE-NORM
N$81
  Top 0.254: 140.46,53.34 140.46,54.61 146.52,60.67 J73.TIP | 140.46,53.34 C50.1 | L18.2 140.46,53.34
  Bottom 0.254: J73.TIP 146.52,66 146.81,66.29 J78.1
N$82
  Top 0.254: L17.2 140.21,62.99 140.97,63.75 C49.1 142.41,64.68 143.76,66.04 151.14,66.04 J73.RING
  Bottom 0.254: J73.RING 152.82,65.95 J79.1
N$83
  Top 0.254: IC9.8 131.06,56.06 | D18.3 131.06,56.06 | L18.1 136.91,53.34 136.4,52.83 135.5,52.83 C53.- 134.73,52.58 133.86,52.58 131.06,55.37 131.06,56.06
N$84
  Top 0.254: 134.87,61.47 128.57,61.47 IC9.1 | D17.3 134.87,61.47 | 136.48,61.89 136.06,61.47 134.87,61.47 | 136.48,61.89 L17.1 | C54.- 134.99,63.39 136.48,61.89
N$85
  Top 0.254: IC9.2 127.13,64.39 127.76,65.02 C54.+
N$86
  Top 0.254: IC9.7 127.13,52.96 127.76,52.32 C53.+
N$87  (via drill 0.51)
  Top 0.254: IC9.4 124.59,63.12 v124.21,63.5
  Bottom 0.254: v124.21,63.5 122.43,63.5 121.41,62.48 J74.4
N$88
  Bottom 0.254: J73.RING-NORM 152.82,51.39 J77.1
N$89
  Bottom 0.254: J73.TIP-NORM 146.52,51.34 146.81,51.05 J76.1
N$90
  Top 0.254: J75.1 159.12,52.71 J73.SLEEVE-NORM
VCC  (via drill 0.51)
  Top 0.254: IC1.6 15.11,12.57 14.99,12.45 C1.2
  Top 0.406: D2.2 25.08,16.7 v25.91,17.53 | IC1.6 15.11,15.88 15.75,16.51 v15.75,17.53 16.24,18.02 D1.2
  Bottom 0.406: J1.3 10.16,18.29 10.92,17.53 v15.75,17.53 v25.91,17.53
VCC1  (via drill 0.51)
  Top 0.254: IC2.6 70.48,12.57 70.36,12.45 C9.2
  Top 0.406: D3.2 80.45,16.7 v81.28,17.53 | IC2.6 70.48,15.88 71.12,16.51 v71.12,17.53 71.61,18.02 D4.2
  Bottom 0.406: J11.3 65.53,18.29 66.29,17.53 v71.12,17.53 v81.28,17.53
VCC2  (via drill 0.51)
  Top 0.254: IC3.6 125.86,12.57 125.73,12.45 C15.2
  Top 0.406: D5.2 135.82,16.7 v136.65,17.53 | IC3.6 125.86,15.88 126.49,16.51 v126.49,17.53 126.98,18.02 D6.2
  Bottom 0.406: J20.3 120.9,18.29 121.67,17.53 v126.49,17.53 v136.65,17.53
VCC3  (via drill 0.51)
  Top 0.254: IC4.6 15.11,33.4 14.99,33.27 C21.2
  Top 0.406: D7.2 25.08,37.53 v25.91,38.35 | IC4.6 15.11,36.7 15.75,37.34 v15.75,38.35 16.24,38.85 D8.2
  Bottom 0.406: J29.3 10.16,39.12 10.92,38.35 v15.75,38.35 v25.91,38.35
VCC4  (via drill 0.51)
  Top 0.254: IC5.6 70.48,33.4 70.36,33.27 C27.2
  Top 0.406: D9.2 80.45,37.53 v81.28,38.35 | IC5.6 70.48,36.7 71.12,37.34 v71.12,38.35 71.61,38.85 D10.2
  Bottom 0.406: J38.3 65.53,39.12 66.29,38.35 v71.12,38.35 v81.28,38.35
VCC5  (via drill 0.51)
  Top 0.254: IC6.6 125.86,33.4 125.73,33.27 C33.2
  Top 0.406: D11.2 135.82,37.53 v136.65,38.35 | IC6.6 125.86,36.7 126.49,37.34 v126.49,38.35 126.98,38.85 D12.2
  Bottom 0.406: J47.3 120.9,39.12 121.67,38.35 v126.49,38.35 v136.65,38.35
VCC6  (via drill 0.51)
  Top 0.254: IC7.6 15.11,54.23 14.99,54.1 C39.2
  Top 0.406: D13.2 25.08,58.35 v25.91,59.18 | IC7.6 15.11,57.53 15.75,58.17 v15.75,59.18 16.24,59.67 D14.2
  Bottom 0.406: J56.3 10.16,59.94 10.92,59.18 v15.75,59.18 v25.91,59.18
VCC7  (via drill 0.51)
  Top 0.254: IC8.6 70.48,54.23 70.36,54.1 C45.2
  Top 0.406: D15.2 80.45,58.35 v81.28,59.18 | IC8.6 70.48,57.53 71.12,58.17 v71.12,59.18 71.61,59.67 D16.2
  Bottom 0.406: J65.3 65.53,59.94 66.29,59.18 v71.12,59.18 v81.28,59.18
VCC8  (via drill 0.51)
  Top 0.254: IC9.6 125.86,54.23 125.73,54.1 C51.2
  Top 0.406: D17.2 135.82,58.35 v136.65,59.18 | IC9.6 125.86,57.53 126.49,58.17 v126.49,59.18 126.98,59.67 D18.2
  Bottom 0.406: J74.3 120.9,59.94 121.67,59.18 v126.49,59.18 v136.65,59.18
VNEG  (via drill 0.51)
  Top 0.254: D1.1 21.27,17.93 | IC1.5 13.84,12.66 C2.2
  Top 0.406: 21.27,17.93 D2.1 22.66,15.49 v21.84,15.49 | IC1.5 13.84,15.88 13.72,16 v13.72,16.51
  Bottom 0.406: J1.2 10.16,15.75 10.92,16.51 v13.72,16.51 20.83,16.51 v21.84,15.49
VNEG1  (via drill 0.51)
  Top 0.254: D4.1 76.64,17.93 | IC2.5 69.22,12.66 C10.2
  Top 0.406: 76.64,17.93 D3.1 78.03,15.49 v77.22,15.49 | IC2.5 69.22,15.88 69.09,16 v69.09,16.51
  Bottom 0.406: J11.2 65.53,15.75 66.29,16.51 v69.09,16.51 76.2,16.51 v77.22,15.49
VNEG2  (via drill 0.51)
  Top 0.254: D6.1 132.01,17.93 | IC3.5 124.59,12.66 C16.2
  Top 0.406: 132.01,17.93 D5.1 133.4,15.49 v132.59,15.49 | IC3.5 124.59,15.88 124.46,16 v124.46,16.51
  Bottom 0.406: J20.2 120.9,15.75 121.67,16.51 v124.46,16.51 131.57,16.51 v132.59,15.49
VNEG3  (via drill 0.51)
  Top 0.254: D8.1 21.27,38.76 | IC4.5 13.84,33.49 C22.2
  Top 0.406: 21.27,38.76 D7.1 22.66,36.32 v21.84,36.32 | IC4.5 13.84,36.7 13.72,36.83 v13.72,37.34
  Bottom 0.406: J29.2 10.16,36.58 10.92,37.34 v13.72,37.34 20.83,37.34 v21.84,36.32
VNEG4  (via drill 0.51)
  Top 0.254: D10.1 76.64,38.76 | IC5.5 69.22,33.49 C28.2
  Top 0.406: 76.64,38.76 D9.1 78.03,36.32 v77.22,36.32 | IC5.5 69.22,36.7 69.09,36.83 v69.09,37.34
  Bottom 0.406: J38.2 65.53,36.58 66.29,37.34 v69.09,37.34 76.2,37.34 v77.22,36.32
VNEG5  (via drill 0.51)
  Top 0.254: D12.1 132.01,38.76 | IC6.5 124.59,33.49 C34.2
  Top 0.406: 132.01,38.76 D11.1 133.4,36.32 v132.59,36.32 | IC6.5 124.59,36.7 124.46,36.83 v124.46,37.34
  Bottom 0.406: J47.2 120.9,36.58 121.67,37.34 v124.46,37.34 131.57,37.34 v132.59,36.32
VNEG6  (via drill 0.51)
  Top 0.254: D14.1 21.27,59.58 | IC7.5 13.84,54.32 C40.2
  Top 0.406: 21.27,59.58 D13.1 22.66,57.15 v21.84,57.15 | IC7.5 13.84,57.53 13.72,57.66 v13.72,58.17
  Bottom 0.406: J56.2 10.16,57.4 10.92,58.17 v13.72,58.17 20.83,58.17 v21.84,57.15
VNEG7  (via drill 0.51)
  Top 0.254: D16.1 76.64,59.58 | IC8.5 69.22,54.32 C46.2
  Top 0.406: 76.64,59.58 D15.1 78.03,57.15 v77.22,57.15 | IC8.5 69.22,57.53 69.09,57.66 v69.09,58.17
  Bottom 0.406: J65.2 65.53,57.4 66.29,58.17 v69.09,58.17 76.2,58.17 v77.22,57.15
VNEG8  (via drill 0.51)
  Top 0.254: D18.1 132.01,59.58 | IC9.5 124.59,54.32 C52.2
  Top 0.406: 132.01,59.58 D17.1 133.4,57.15 v132.59,57.15 | IC9.5 124.59,57.53 124.46,57.66 v124.46,58.17
  Bottom 0.406: J74.2 120.9,57.4 121.67,58.17 v124.46,58.17 131.57,58.17 v132.59,57.15

## Text on the board
Bottom: V10 | V10 | V10 | V10 | V10 | V10 | V10 | V10 | V10
tPlace: T | R | S | T | R | S | T | R | S | THAT 1646 / Breakout | THAT 1646 / Breakout | THAT 1646 / Breakout | IN | IN | IN | V+ | V+ | V+ | V- | V- | V- | GND | GND | GND | TN | RN | SN | TN | RN | SN | TN | RN | SN | T | R | S | T | R | S | T | R | S | THAT 1646 / Breakout | THAT 1646 / Breakout | THAT 1646 / Breakout | IN | IN | IN | V+ | V+ | V+ | V- | V- | V- | GND | GND | GND | TN | RN | SN | TN | RN | SN | TN | RN | SN | T | R | S | T | R | S | T | R | S | THAT 1646 / Breakout | THAT 1646 / Breakout | THAT 1646 / Breakout | IN | IN | IN | V+ | V+ | V+ | V- | V- | V- | GND | GND | GND | TN | RN | SN | TN | RN | SN | TN | RN | SN
bPlace: T | R | S | T | R | S | T | R | S | IN | IN | IN | V+ | V+ | V+ | THAT 1646 / OutSmarts / Line Driver / Breakout | THAT 1646 / OutSmarts / Line Driver / Breakout | THAT 1646 / OutSmarts / Line Driver / Breakout | Chassis | Chassis | Chassis | V- | V- | V- | GND | GND | GND | TN | RN | SN | TN | RN | SN | TN | RN | SN | Cut jumper to / isolate chassis / and circuit grounds | Cut jumper to / isolate chassis / and circuit grounds | Cut jumper to / isolate chassis / and circuit grounds | T | R | S | T | R | S | T | R | S | IN | IN | IN | V+ | V+ | V+ | THAT 1646 / OutSmarts / Line Driver / Breakout | Chassis | THAT 1646 / OutSmarts / Line Driver / Breakout | Chassis | THAT 1646 / OutSmarts / Line Driver / Breakout | Chassis | V- | V- | V- | GND | GND | GND | TN | RN | SN | TN | RN | SN | TN | RN | SN | Cut jumper to / isolate chassis / and circuit grounds | Cut jumper to / isolate chassis / and circuit grounds | Cut jumper to / isolate chassis / and circuit grounds | T | R | S | T | R | S | T | R | S | IN | IN | IN | V+ | THAT 1646 / OutSmarts / Line Driver / Breakout | V+ | THAT 1646 / OutSmarts / Line Driver / Breakout | V+ | THAT 1646 / OutSmarts / Line Driver / Breakout | Chassis | Chassis | Chassis | V- | V- | V- | GND | GND | GND | Cut jumper to / isolate chassis / and circuit grounds | TN | RN | SN | Cut jumper to / isolate chassis / and circuit grounds | TN | RN | SN | Cut jumper to / isolate chassis / and circuit grounds | TN | RN | SN